# EAGLE board untitled (EAGLE 9.5.2)
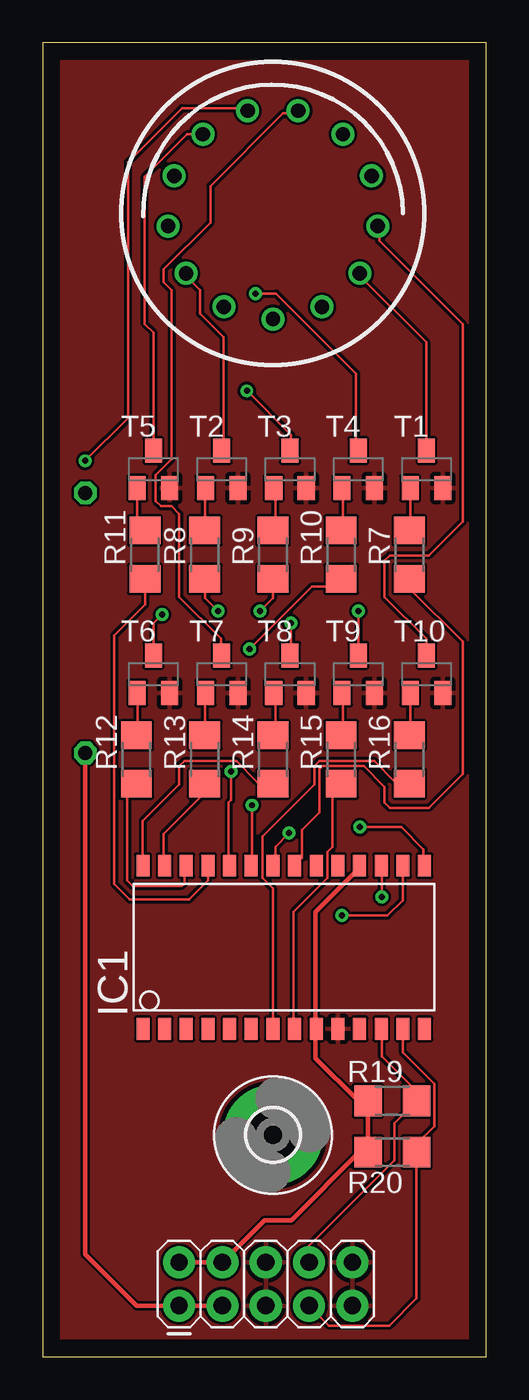
[diagram p0: board, top side]
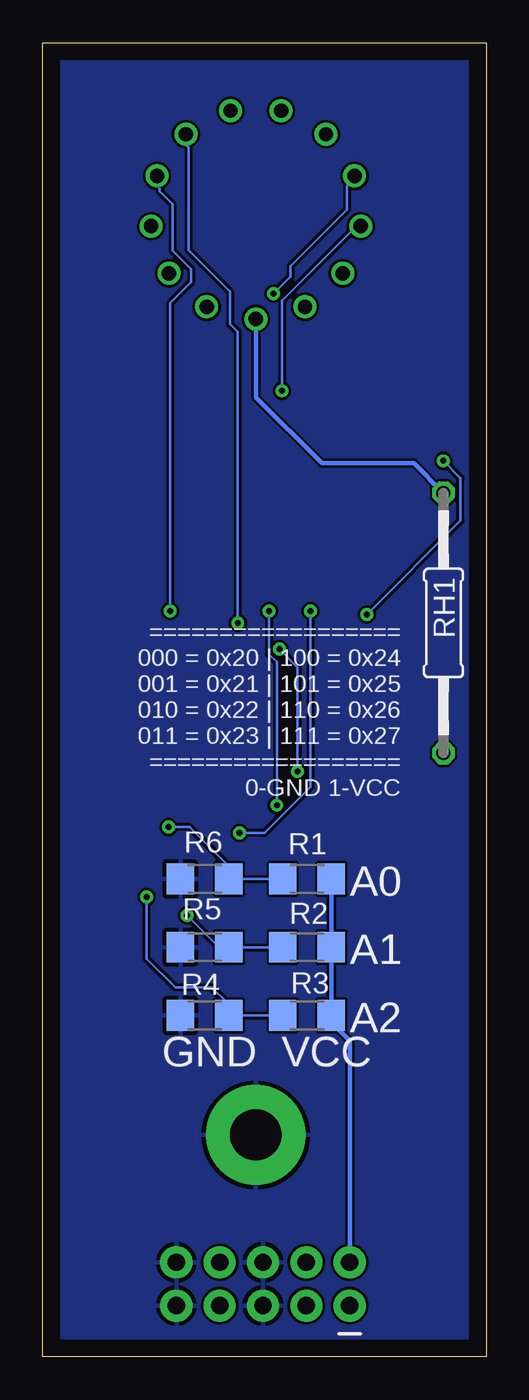
[diagram p1: board, bottom side, seen from below]

Size 26 x 77 mm. Coordinates in mm from the lower left corner, seen from the top.
Outline: 0,0 26,0 26,77 0,77 0,0
Copper layers (1*16): Top 0.035mm / dielectric 1.5mm / Bottom 0.035mm
Design rules "default": minimum track width 6mil, minimum drill 0.35mm, track to track 6mil, track to pad 6mil, pad to pad 6mil, via to via 6mil, smd to smd 6mil, copper to edge 40mil, drill to drill 6mil, minimum pad ring 10mil, minimum via ring 8mil, stop-mask expansion 4mil, vias tented up to drill 0mil, thermal gap 10mil

## Footprints (pad centres in the part's own frame; a part is rotated, then mirrored left to right if it is on the bottom)
3,0-PAD = drill 3 pad 5.842: B3,0 0,0
SO28W = smd 0.762 x 1.27: 1 -7.62,-4.78; 2 -6.35,-4.78; 3 -5.08,-4.78; 4 -3.81,-4.78; 5 -2.54,-4.78; 6 -1.27,-4.78; 7 0,-4.78; 8 1.27,-4.78; 9 2.54,-4.78; 10 3.81,-4.78; 11 5.08,-4.78; 12 6.35,-4.78; 13 7.62,-4.78; 14 8.89,-4.78; 15 8.89,4.78; 16 7.62,4.78; 17 6.35,4.78; 18 5.08,4.78; 19 3.81,4.78; 20 2.54,4.78; 21 1.27,4.78; 22 0,4.78; 23 -1.27,4.78; 24 -2.54,4.78; 25 -3.81,4.78; 26 -5.08,4.78; 27 -6.35,4.78; 28 -7.62,4.78
2X5 = drill 1.016 pad 1.88: 1 0,0; 2 0,2.54; 3 2.54,0; 4 2.54,2.54; 5 5.08,0; 6 5.08,2.54; 7 7.62,0; 8 7.62,2.54; 9 10.16,0; 10 10.16,2.54
IN-14 = drill 0.84: 0 5.094,-3.516; 1 -5.094,-3.516; 2 -6.145,-0.746; 3 -5.788,2.195; 4 -4.105,4.633; 5 -1.481,6.01; 6 1.481,6.01; 7 4.105,4.633; 8 5.788,2.195; 9 6.145,-0.746; A 0,-6.19; LHDP 2.877,-5.481; RHDP -2.877,-5.481
R1206 = smd 1.6 x 1.803: 1 -1.422,0; 2 1.422,0
0207/15 = drill 0.813 octagon: 1 -7.62,0; 2 7.62,0
SOT23-BEC = smd 1 x 1.4: B -0.95,-1.1; C 0,1.1; E 0.95,-1.1

## Placement (x,y rotation side)
H1  MOUNT-PAD-ROUND3.0  [3,0-PAD]  13.5,13 0 top
IC1  MCP23017SO  [SO28W]  13.5,24 0 top
J1  [2X5]  8,3 0 top
N1  IN-14  [IN-14]  13.5,67 0 top
R1  0Ω  [R1206]  10.5,28 180 bottom
R2  0Ω  [R1206]  10.5,24 180 bottom
R3  0Ω  [R1206]  10.5,20 180 bottom
R4  0Ω  [R1206]  16.5,20 180 bottom
R5  0Ω  [R1206]  16.5,24 180 bottom
R6  0Ω  [R1206]  16.5,28 180 bottom
R7  [R1206]  21.5,47 90 top
R8  [R1206]  9.5,47 90 top
R9  [R1206]  13.5,47 90 top
R10  [R1206]  17.5,47 90 top
R11  [R1206]  6,47 90 top
R12  [R1206]  5.5,35 90 top
R13  [R1206]  9.5,35 90 top
R14  [R1206]  13.5,35 90 top
R15  [R1206]  17.5,35 90 top
R16  [R1206]  21.5,35 90 top
R19  [R1206]  20.5,15 180 top
R20  [R1206]  20.5,12 180 top
RH1  33KΩ  [0207/15]  2.5,43 270 bottom
T1  [SOT23-BEC]  22.5,52 0 top
T2  [SOT23-BEC]  10.5,52 0 top
T3  [SOT23-BEC]  14.5,52 0 top
T4  [SOT23-BEC]  18.5,52 0 top
T5  [SOT23-BEC]  6.5,52 0 top
T6  [SOT23-BEC]  6.5,40 0 top
T7  [SOT23-BEC]  10.5,40 0 top
T8  [SOT23-BEC]  14.5,40 0 top
T9  [SOT23-BEC]  18.5,40 0 top
T10  [SOT23-BEC]  22.5,40 0 top

## Library data of the parts
H1 = holes
IC1 = adafruit
J1 = SparkFun-Connectors; PROD_ID: CONN-08499; SF_ID: PRT-0778
N1 = russian-nixies
R1-R16 R19 R20 RH1 = resistor
T1-T10 = transistor

## Nets
A0: IC1.15 R1.2 R6.1
A1: IC1.16 R2.2 R5.1
A2: IC1.17 R3.2 R4.1
GND: H1.B3,0 IC1.10 J1.5 J1.6 J1.9 J1.10 R4.2 R5.2 R6.2 T1.E T2.E T3.E T4.E T5.E T6.E T7.E T8.E T9.E T10.E
KAT0: IC1.21 R7.1
KAT1: IC1.22 R8.1
KAT2: IC1.23 R9.1
KAT3: IC1.24 R10.1
KAT4: IC1.25 R11.1
KAT5: IC1.26 R12.1
KAT6: IC1.27 R13.1
KAT7: IC1.28 R14.1
KAT8: IC1.8 R15.1
KAT9: IC1.7 R16.1
N$2: R7.2 T1.B
N$3: R16.2 T10.B
N$4: R15.2 T9.B
N$5: R14.2 T8.B
N$6: R13.2 T7.B
N$7: R12.2 T6.B
N$8: R11.2 T5.B
N$9: R10.2 T4.B
N$10: R9.2 T3.B
N$11: R8.2 T2.B
SCL: IC1.12 J1.8 R19.1
SDA: IC1.13 J1.7 R20.1
T0: N1.0 T1.C
T1: N1.1 T2.C
T2: N1.2 T3.C
T3: N1.3 T4.C
T4: N1.4 T5.C
T5: N1.5 T6.C
T6: N1.6 T7.C
T7: N1.7 T8.C
T8: N1.8 T9.C
T9: N1.9 T10.C
TUBE_A: N1.A RH1.1
VCC: IC1.9 IC1.18 J1.2 J1.4 R1.1 R2.1 R3.1 R19.2 R20.2
VCCHV: J1.1 J1.3 RH1.2

## Tracks (layer width: path | path; a pad name or v marks a point on that pad's centre or on a via)
A0  (via drill 0.35)
  Top 0.152: v18.61,31.03 21.03,31.03 22.33,29.73 22.33,28.82 IC1.15
  Bottom 0.152: R1.2 R6.1 15.17,28.05 15.17,28.82 17.39,31.03 v18.61,31.03
A1  (via drill 0.35)
  Top 0.152: v17.54,25.85 20.22,25.85 21.11,26.75 21.11,28.66 IC1.16
  Bottom 0.152: 11.97,24 R5.1 15.17,24.09 15.78,24.09 v17.54,25.85 | 11.97,24 R2.2 11.97,23.94 11.97,24
A2  (via drill 0.35)
  Top 0.152: v19.89,26.94 19.89,28.66 IC1.17
  Bottom 0.152: R3.2 R4.1 15.17,20.13 15.17,20.74 16.08,21.65 18.22,21.65 19.89,23.33 v19.89,26.94
GND
  Top 0.152: 19.89,50.91 19.59,50.91
  pour Bottom: 0,77 0,0 26,0 26,77
  pour Top: 0,77 0,0 26,0 26,77
KAT0
  Top 0.152: IC1.21 15.21,29.22 15.21,30.86 16.24,31.89 16.24,34.45 16.39,34.61 18.83,34.61 20.05,33.39 20.05,32.47 20.35,32.17 22.64,32.17 24.62,34.15 24.62,41.92 21.57,44.97 21.57,45.43 R7.1
KAT1  (via drill 0.35)
  Top 0.152: v14.45,30.69 13.65,29.88 13.65,28.82 IC1.22 | v10.29,43.71 9.53,44.47 9.53,45.43 R8.1
  Bottom 0.152: v14.45,30.69 12.99,30.69 10.29,33.39 v10.29,43.71
KAT2  (via drill 0.35)
  Top 0.152: v12.27,32.32 12.27,28.82 IC1.23 | v12.73,43.71 13.49,44.47 13.49,45.43 R9.1
  Bottom 0.152: v12.27,32.32 12.27,40.7 12.73,41.16 v12.73,43.71
KAT3  (via drill 0.35)
  Top 0.152: v11.05,34.3 11.05,32.63 10.9,32.47 10.9,28.82 IC1.24 | v12.12,41.47 15.78,45.12 17.15,45.12 17.46,45.43 R10.1
  Bottom 0.152: v11.05,34.3 11.05,40.4 v12.12,41.47
KAT4
  Top 0.152: R11.1 6,44.08 4.2,42.28 4.2,27.71 5.11,26.79 8.57,26.79 9.68,27.9 9.68,28.66 IC1.25
KAT5
  Top 0.152: IC1.26 8.31,28.66 8.31,27.75 8.16,27.6 5.26,27.6 4.96,27.9 4.96,33.08 5.42,33.54 R12.1
KAT6
  Top 0.152: IC1.27 7.09,28.82 7.09,30.65 9.38,32.93 9.38,33.54 R13.1
KAT7
  Top 0.152: IC1.28 5.87,28.82 5.87,31.41 8.01,33.54 8.01,34.61 8.31,34.91 11.36,34.91 12.58,33.69 13.49,33.69 R14.1
KAT8
  Top 0.152: IC1.8 14.71,19.37 14.71,26.07 16.69,28.05 16.69,29.58 17,29.88 17,33.08 17.46,33.54 R15.1
KAT9
  Top 0.152: IC1.7 13.49,19.37 13.49,27.44 12.88,28.05 12.88,30.49 15.93,33.54 15.93,34.61 16.24,34.91 19.44,34.91 20.66,33.69 21.42,33.69 R16.1
N$2
  Top 0.152: T1.B 21.57,50.76 21.57,48.48 R7.2
N$3
  Top 0.152: T10.B 21.57,38.87 21.57,36.44 R16.2
N$4
  Top 0.152: T9.B 17.61,38.87 17.61,36.44 R15.2
N$5
  Top 0.152: T8.B 13.65,38.87 13.65,36.44 R14.2
N$6
  Top 0.152: T7.B 9.53,38.87 9.53,36.44 R13.2
N$7
  Top 0.152: T6.B 5.57,38.87 5.57,36.44 R12.2
N$8
  Top 0.152: T5.B 5.55,48.56 R11.2
N$9
  Top 0.152: T4.B 17.61,50.76 17.61,48.48 R10.2
N$10
  Top 0.152: T3.B 13.65,50.76 13.65,48.48 R9.2
N$11
  Top 0.152: T2.B 9.53,50.76 9.53,48.48 R8.2
SCL
  Top 0.152: IC1.12 19.89,19.22 19.89,17.61 21.92,15.58 R19.1 20.61,13.69 20.61,11.5 15.62,6.52 J1.8
SDA
  Top 0.152: J1.7 16.79,1.83 20.33,1.83 21.92,3.42 R20.1 21.92,12.48 22.95,13.5 22.95,16 21.12,17.83 IC1.13
T0
  Top 0.152: T1.C 22.48,53.2 22.48,59.45 18.52,63.41 N1.0
T1
  Top 0.152: T2.C 10.6,53.2 10.6,59.75 9.23,61.12 9.23,62.5 8.31,63.41 N1.1
T2  (via drill 0.35)
  Top 0.152: v11.97,56.6 14.56,54.01 14.56,53.2 T3.C
  Bottom 0.152: v11.97,56.6 11.97,61.89 7.7,66.15 7.4,66.15 N1.2
T3  (via drill 0.35)
  Top 0.152: v12.47,62.3 13.68,62.3 18.37,57.61 18.37,53.2 T4.C
  Bottom 0.152: v12.47,62.3 11.47,63.3 11.47,63.91 8.16,67.22 8.16,68.59 7.7,69.05 N1.3
T4
  Top 0.152: N1.4 8.48,71.63 5.98,69.14 5.98,60.52 6.5,60 T5.C
T5  (via drill 0.35)
  Top 0.152: N1.5 11.97,73.01 11.82,73.16 8.16,73.16 5,70 5,55 v2.5,52.5 | T6.C 6.5,43 v7,43.5
  Bottom 0.152: v7,43.5 1.5,49 1.5,51.5 v2.5,52.5
T6
  Top 0.152: T7.C 10.45,41.16 10.45,42.08 8.01,44.51 8.01,49.39 7.55,49.85 6.94,49.85 6.64,50.15 6.64,51.68 7.55,52.59 7.55,62.5 7.09,62.95 7.09,63.72 9.84,66.46 9.84,68.59 14.1,72.86 14.86,72.86 N1.6
T7  (via drill 0.35)
  Top 0.152: v14.56,42.99 14.56,41.16 T8.C
  Bottom 0.152: v14.56,42.99 14.56,60.06 15.02,60.52 15.02,62.41 17.46,64.85 17.46,70.88 17.61,71.03 17.61,71.49 N1.7
T8  (via drill 0.35)
  Top 0.152: v18.52,43.71 18.52,41.16 T9.C
  Bottom 0.152: v18.52,43.71 18.52,61.73 17.3,62.95 17.3,63.74 18.37,64.81 18.37,67.53 19.13,68.29 19.13,68.44 19.29,68.59 19.29,69.05 N1.8
T9
  Top 0.152: T10.C 22.48,41.16 22.48,42.08 20.05,44.51 20.05,46.65 20.35,46.95 22.64,46.95 24.62,48.93 24.62,60.52 19.74,65.39 19.74,66.15 N1.9
TUBE_A
  Bottom 0.152: 13.49,60.67 N1.A
  Bottom 0.254: 13.49,60.67 13.49,56.21 9.64,52.36 4.24,52.36 RH1.1
VCC
  Top 0.152: 16.08,19.22 IC1.9
  Top 0.254: J1.2 J1.4 13,8 14.58,8 18.58,12 R20.2 R19.2 18.5,15 16,17.5 16,19.13 16.08,19.22 16,19.3 16,26.06 18.58,28.64 IC1.18
  Bottom 0.152: R3.1 9.29,19.79
  Bottom 0.254: R3.1 R2.1 R1.1 | J1.2 8,18.5 9.29,19.79
VCCHV
  Top 0.254: J1.3 J1.1 5.5,3 2.5,6 RH1.2

## Text on the board
bPlace: ================== / 000 = 0x20 | 100 = 0x24 / 001 = 0x21 | 101 = 0x25 / 010 = 0x22 | 110 = 0x26 / 011 = 0x23 | 111 = 0x27 / ================== / 0-GND 1-VCC | A0 | A1 | A2 | VCC | GND